# EAGLE board 605_motor (EAGLE 8.1.1)
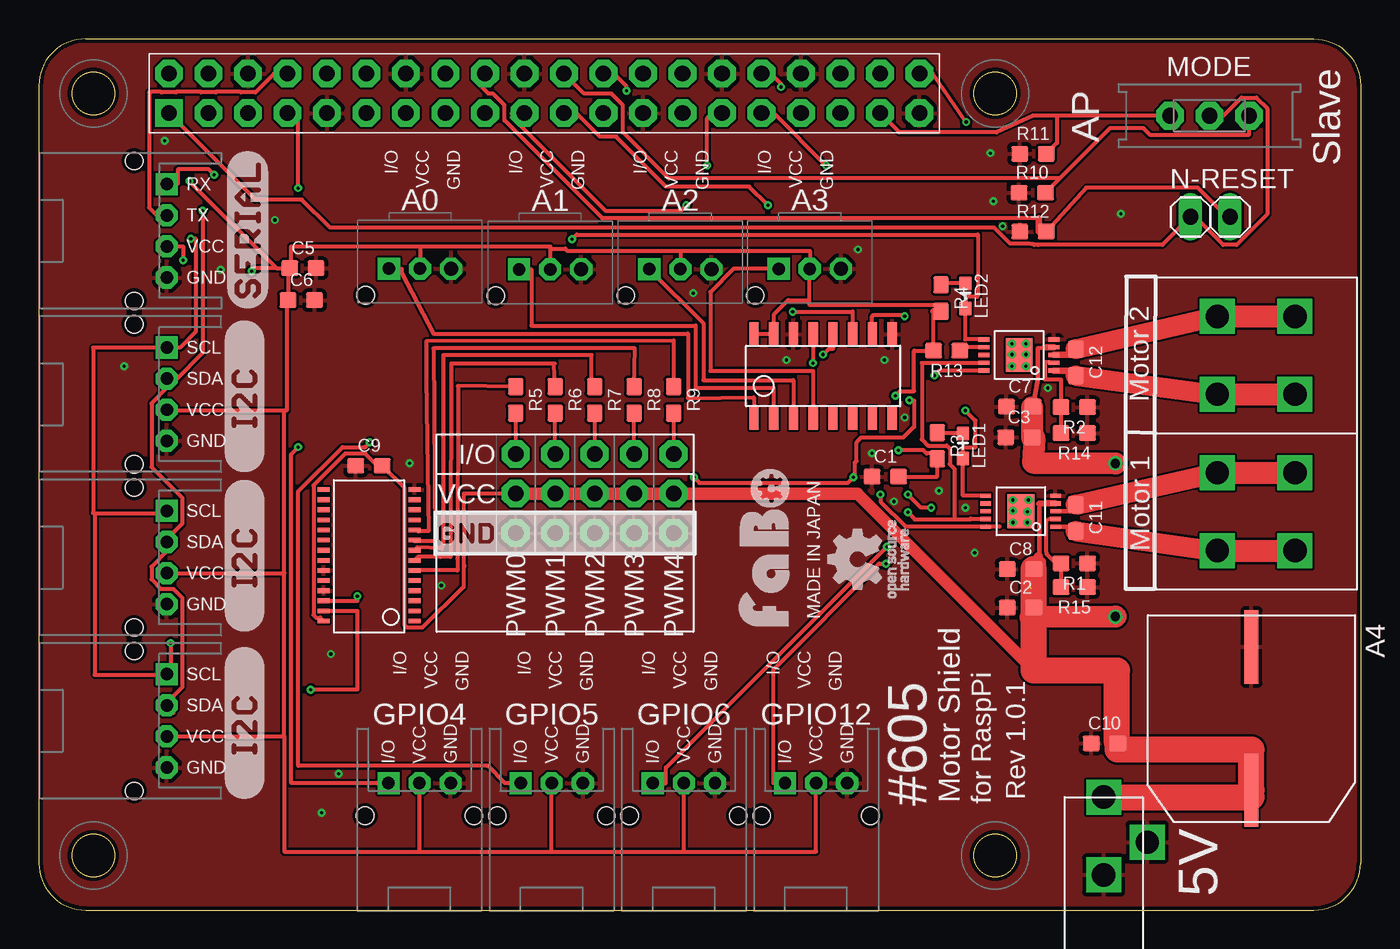
[diagram p0: board, top side]
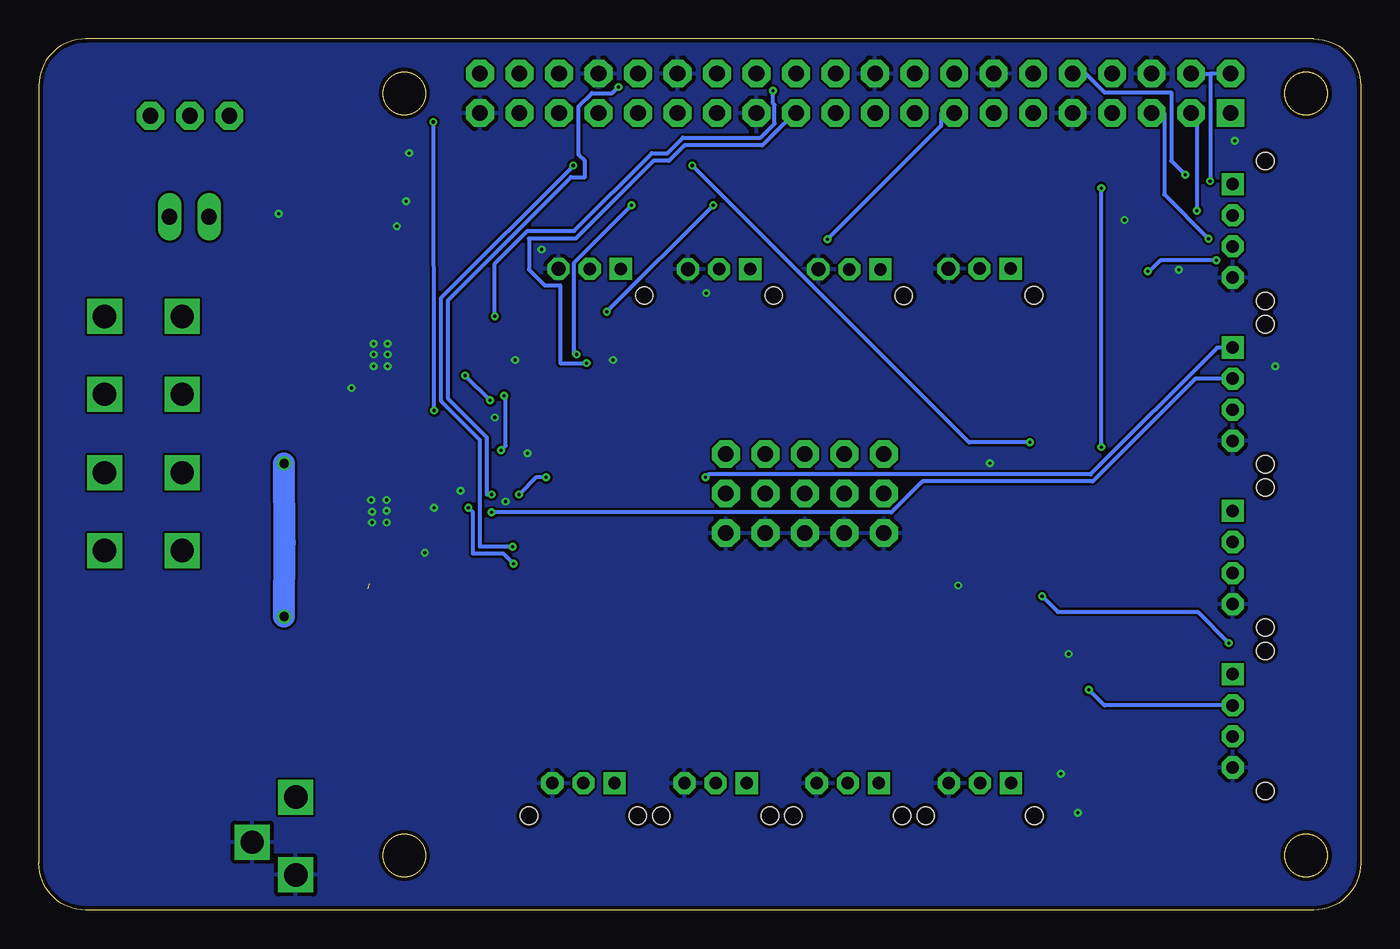
[diagram p1: board, bottom side, seen from below]

Size 85 x 56 mm. Coordinates in mm from the lower left corner, seen from the top.
Copper layers (1*16): Top 0.035mm / dielectric 1.5mm / Bottom 0.035mm
Design rules "Elecrow_2-layer_eagle_rule": minimum track width 6mil, minimum drill 12mil, track to track 6mil, track to pad 6mil, pad to pad 6mil, via to via 6mil, smd to smd 0mil, copper to edge 10mil, drill to drill 10mil, minimum pad ring 10mil, minimum via ring 6mil, stop-mask expansion 2mil, vias tented up to drill 100mil, thermal gap 10mil

## Footprints (pad centres in the part's own frame; a part is rotated, then mirrored left to right if it is on the bottom)
FABO_BRICK_3PIN_B03B-PASK-1 = drill 0.9 pad 1.422 octagon: GND -2,0 | drill 0.8 pad 1.422 square: I/O 2,0 | drill 0.8 pad 1.422 octagon: VCC 0,0 | hole 1.1: 3.5,1.7
H13 = smd 4.7 x 0.9: MINUS -4.6,0; PLUS 4.6,0
0603 = smd 1.1 x 1: 1 -0.85,0; 2 0.85,0
FABO_BRICK_3PIN_S03B-PASK-2 = drill 0.8 pad 1.422 octagon: GND -2,0; VCC 0,0 | drill 0.8 pad 1.422 square: I/O 2,0 | hole 1.1: 3.5,2.1; -3.5,2.1
FABO_BRICK_3PIN_HEADER = drill 1 pad 1.778 octagon: GND -2.54,0; I/O 2.54,0; VCC 0,0
FABO_BRICK_I2C_S04B-PASK-2 = drill 0.8 pad 1.422 octagon: GND -3,0; SDA 1,0; VCC -1,0 | drill 0.8 pad 1.422 square: SCL 3,0 | hole 1.1: 4.5,2.1; -4.5,2.1
MICROCHIP-MCP3008 = smd 0.6 x 1.5: 1 -4.445,-2.7; 2 -3.175,-2.7; 3 -1.905,-2.7; 4 -0.635,-2.7; 5 0.635,-2.7; 6 1.905,-2.7; 7 3.175,-2.7; 8 4.445,-2.7; 9 4.445,2.7; 10 3.175,2.7; 11 1.905,2.7; 12 0.635,2.7; 13 -0.635,2.7; 14 -1.905,2.7; 15 -3.175,2.7; 16 -4.445,2.7
0603' = smd 0.9 x 0.8: ANODE -0.8,0; CATHODE 0.8,0
EG1218 = drill 1 pad 1.778 octagon: 1 -2.54,0; 2 0,0; 3 2.54,0
1X02 = drill 1.016 long: 1 -1.27,0; 2 1.27,0
FABO_BRICK_SERIAL_S04B-PASK-2 = drill 0.8 pad 1.422 octagon: GND -3,0; TX 1,0; VCC -1,0 | drill 0.8 pad 1.422 square: RX 3,0 | hole 1.1: 4.5,2.1; -4.5,2.1
RASPBERRY_PI_B+ = drill 1 pad 1.778 square: 1 0,-2.54 | drill 1 pad 1.778 octagon: 2 0,0; 3 2.54,-2.54; 4 2.54,0; 5 5.08,-2.54; 6 5.08,0; 7 7.62,-2.54; 8 7.62,0; 9 10.16,-2.54; 10 10.16,0; 11 12.7,-2.54; 12 12.7,0; 13 15.24,-2.54; 14 15.24,0; 15 17.78,-2.54; 16 17.78,0; 17 20.32,-2.54; 18 20.32,0; 19 22.86,-2.54; 20 22.86,0; 21 25.4,-2.54; 22 25.4,0; 23 27.94,-2.54; 24 27.94,0; 25 30.48,-2.54; 26 30.48,0; 27 33.02,-2.54; 28 33.02,0; 29 35.56,-2.54; 30 35.56,0; 31 38.1,-2.54; 32 38.1,0; 33 40.64,-2.54; 34 40.64,0; 35 43.18,-2.54; 36 43.18,0; 37 45.72,-2.54; 38 45.72,0; 39 48.26,-2.54; 40 48.26,0
DRV8830 = smd 0.27 x 0.7: 1 -1,-2.24; 2 -0.5,-2.24; 3 0,-2.24; 4 0.5,-2.24; 5 1,-2.24; 6 1,2.26; 7 0.5,2.26; 8 0,2.26; 9 -0.5,2.26; 10 -1,2.26 | smd 2.18 x 1.72: P$1 0,0
PCA9685 = smd 0.3 x 0.75: 1 -4.15,-2.93; 2 -3.5,-2.93; 3 -2.85,-2.93; 4 -2.2,-2.93; 5 -1.55,-2.93; 6 -0.9,-2.93; 7 -0.25,-2.93; 8 0.4,-2.93; 9 1.05,-2.93; 10 1.7,-2.93; 11 2.35,-2.93; 12 3,-2.93; 13 3.65,-2.93; 14 4.3,-2.93; 15 4.3,2.92; 16 3.65,2.92; 17 3,2.92; 18 2.35,2.92; 19 1.7,2.92; 20 1.05,2.92; 21 0.4,2.92; 22 -0.25,2.92; 23 -0.9,2.92; 24 -1.55,2.92; 25 -2.2,2.92; 26 -2.85,2.92; 27 -3.5,2.92; 28 -4.15,2.92
ML-1400-S1 = drill 1.5 square: LEFT1 -2.5,2.5; LEFT2 -2.5,-2.5; RIGHT1 2.5,2.5; RIGHT2 2.5,-2.5
4UCON-DC = drill 1.5 square: GND1 0.5,0; GND2 2.6,-2.8; VCC 5.5,0

## Placement (x,y rotation side)
A0  [FABO_BRICK_3PIN_B03B-PASK-1]  24.51,41.23 180 top
A1  [FABO_BRICK_3PIN_B03B-PASK-1]  32.88,41.19 180 top
A2  [FABO_BRICK_3PIN_B03B-PASK-1]  41.25,41.2 180 top
A3  [FABO_BRICK_3PIN_B03B-PASK-1]  49.57,41.21 180 top
A4  [H13]  77.98,12.31 270 top
C1  0.1uf  [0603]  54.43,27.86 0 top
C2  10uF  [0603]  63.13,19.44 0 top
C3  10uF  [0603]  63.03,30.39 0 top
C5  0.1uf  [0603]  16.98,41.26 0 top
C6  22uf  [0603]  16.88,39.21 0 top
C7  0.1uF  [0603]  63.08,32.36 0 top
C8  0.1uF  [0603]  63.13,21.91 0 top
C9  0.1uF  [0603]  21.23,28.56 0 top
C10  0.1uF  [0603]  68.53,10.71 0 top
C11  1000pF  [0603]  66.68,25.21 270 top
C12  1000pF  [0603]  66.68,35.21 270 top
GPIO4  [FABO_BRICK_3PIN_S03B-PASK-2]  24.48,8.16 180 top
GPIO5  [FABO_BRICK_3PIN_S03B-PASK-2]  32.98,8.16 180 top
GPIO6  [FABO_BRICK_3PIN_S03B-PASK-2]  41.48,8.16 180 top
GPIO12  [FABO_BRICK_3PIN_S03B-PASK-2]  49.98,8.16 180 top
GPIO23S  [FABO_BRICK_3PIN_HEADER]  30.66,26.77 90 top
GPIO24S  [FABO_BRICK_3PIN_HEADER]  33.2,26.77 90 top
GPIO25S  [FABO_BRICK_3PIN_HEADER]  35.74,26.77 90 top
GPIO26S  [FABO_BRICK_3PIN_HEADER]  38.28,26.77 90 top
GPIO27S  [FABO_BRICK_3PIN_HEADER]  40.82,26.77 90 top
I2C1  [FABO_BRICK_I2C_S04B-PASK-2]  8.23,33.16 90 top
I2C2  [FABO_BRICK_I2C_S04B-PASK-2]  8.23,22.66 90 top
I2C3  [FABO_BRICK_I2C_S04B-PASK-2]  8.23,12.16 90 top
IC1  [MICROCHIP-MCP3008]  50.43,34.33 0 top
LED1  [0603']  59.42,29.84 270 top
LED2  [0603']  59.57,39.48 270 top
MODE  [EG1218]  75.28,51.06 0 top
N-RESET  [1X02]  75.33,44.56 0 top
R1  0.4  [0603]  66.58,22.28 180 top
R2  0.4  [0603]  66.58,32.33 180 top
R3  1K  [0603]  57.77,29.85 270 top
R4  1K  [0603]  58.02,39.34 270 top
R5  220  [0603]  30.66,32.8 270 top
R6  220  [0603]  33.2,32.8 270 top
R7  220  [0603]  35.74,32.8 270 top
R8  220  [0603]  38.28,32.8 270 top
R9  220  [0603]  40.82,32.8 270 top
R10  1K  [0603]  63.88,46.11 0 top
R11  1K  [0603]  63.93,48.61 0 top
R12  1K  [0603]  63.93,43.61 0 top
R13  1K  [0603]  58.38,35.96 180 top
R14  0.4  [0603]  66.58,30.66 180 top
R15  0.4  [0603]  66.58,20.76 180 top
SERIAL  [FABO_BRICK_SERIAL_S04B-PASK-2]  8.23,43.66 90 top
U1  [RASPBERRY_PI_B+]  8.37,53.77 0 top
U$2  [LOGO_SILK_I2C]  14.48,17.91 90 top
U$3  [LOGO_SILK_SERIAL2]  14.73,38.66 90 top
U$4  [LOGO_OSHW_T_MS]  52.68,22.56 90 top
U$5  [LOGO_SILK_I2C]  14.48,7.16 90 top
U$6  [LOGO_SILK_I2C]  14.48,28.16 90 top
U$7  [LOGO_SILK_GND]  25.58,22.96 0 top
U$8  DRV8830  [DRV8830]  63.14,25.64 90 top
U$9  PCA9685  [PCA9685]  21.23,22.73 90 top
U$10  DRV8830  [DRV8830]  63.04,35.68 90 top
U$12  ML-1400-S1  [ML-1400-S1]  78.28,25.61 90 top
U$13  ML-1400-S1  [ML-1400-S1]  78.28,35.66 90 top
U$14  [LOGO_FABO_MS]  48.63,23.3 90 top
U$15  4UCON-DC  [4UCON-DC]  68.48,1.76 90 top

## Library data of the parts
A0 A1-A3 GPIO4-GPIO6 GPIO12 GPIO23S GPIO24S GPIO25S GPIO26S GPIO27S I2C1-I2C3 SERIAL = FaBo-Template
A4 C1-C3 C5-C12 = FaBo-Capacitor
IC1 = FaBo-ADC
LED1 LED2 = FaBo-LED
MODE = FaBo-Switch
N-RESET = pinhead
R1-R15 = FaBo-Resistors
U1 = FaBo-Boards
U$2 U$3 U$5-U$7 U$14 = FaBo-etc
U$4 = FaBo-Logo
U$8-U$10 = FaBo-Motor
U$12 U$13 = FaBo-Terminal
U$15 = FaBo-Supply

## Nets
3V3: MODE.2 N-RESET.1 U1.1
5V: A0.VCC A1.VCC A2.VCC A3.VCC C1.2 C5.1 C6.1 GPIO4.VCC GPIO5.VCC GPIO6.VCC GPIO12.VCC I2C1.VCC I2C2.VCC I2C3.VCC IC1.15 IC1.16 R3.2 R4.2 R13.2 SERIAL.VCC U1.2 U1.4
CE0: IC1.10 U1.24
CH0: A0.I/O IC1.1
CH1: A1.I/O IC1.2
CH2: A2.I/O IC1.3
CH3: A3.I/O IC1.4
CH4: IC1.5
CH5: IC1.6
CH6: IC1.7
CH7: IC1.8
GND: A0.GND A1.GND A2.GND A3.GND A4.MINUS C1.1 C2.1 C3.1 C5.2 C6.2 C7.1 C8.1 C9.1 C10.1 GPIO4.GND GPIO5.GND GPIO6.GND GPIO12.GND GPIO23S.GND GPIO24S.GND GPIO25S.GND GPIO26S.GND GPIO27S.GND I2C1.GND I2C2.GND I2C3.GND IC1.9 IC1.14 R1.1 R2.1 R10.1 R11.1 R12.1 R14.1 R15.1 SERIAL.GND U1.6 U1.9 U1.14 U1.20 U1.25 U1.30 U1.34 U1.39 U$8.5 U$9.14 U$9.23 U$9.25 U$10.5 U$15.GND1 U$15.GND2
GPIO4: GPIO4.I/O U1.7
GPIO5: GPIO5.I/O U1.29
GPIO6: GPIO6.I/O U1.31
GPIO12: GPIO12.I/O U1.32
GPIO13: U1.33
GPIO16: U1.36
GPIO17: U1.11
GPIO18: U1.12
GPIO19: U1.35
GPIO20: U1.38
GPIO21: LED1.CATHODE U1.40 U$8.6
GPIO22: LED2.CATHODE U1.15 U$10.6
GPIO23: U1.16
GPIO24: N-RESET.2 R12.2 U1.18
GPIO25: MODE.3 R10.2 U1.22
GPIO26: MODE.1 R11.2 U1.37
GPIO27: U1.13
LED0: R5.1 U$9.6
LED1: R6.1 U$9.7
LED2: R7.1 U$9.8
LED3: R8.1 U$9.9
LED4: R9.1 U$9.10
M1_1: C11.2 U$8.1 U$12.LEFT1 U$12.LEFT2
M1_2: C11.1 U$8.3 U$12.RIGHT1 U$12.RIGHT2
M2_1: C12.2 U$10.1 U$13.LEFT1 U$13.LEFT2
M2_2: C12.1 U$10.3 U$13.RIGHT1 U$13.RIGHT2
MISO: IC1.12 U1.21
MOSI: IC1.11 U1.19
N$2: R1.2 R15.2 U$8.2
N$3: R2.2 R14.2 U$10.2
N$4: LED1.ANODE R3.1
N$5: R13.1 U$10.7
N$6: LED2.ANODE R4.1
PWM0: GPIO23S.I/O R5.2
PWM1: GPIO24S.I/O R6.2
PWM2: GPIO25S.I/O R7.2
PWM3: GPIO26S.I/O R8.2
PWM4: GPIO27S.I/O R9.2
RX: SERIAL.RX U1.10
SCL: I2C1.SCL I2C2.SCL I2C3.SCL U1.5 U$8.10 U$9.26 U$10.10
SCLK: IC1.13 U1.23
SDA: I2C1.SDA I2C2.SDA I2C3.SDA U1.3 U$8.9 U$9.27 U$10.9
TX: SERIAL.TX U1.8
VCC: A4.PLUS C2.2 C3.2 C7.2 C8.2 C9.2 C10.2 GPIO23S.VCC GPIO24S.VCC GPIO25S.VCC GPIO26S.VCC GPIO27S.VCC U$8.4 U$9.28 U$10.4 U$15.VCC

## Tracks (layer width: path | path; a pad name or v marks a point on that pad's centre or on a via)
3V3
  Top 0.254: MODE.2 76.17,51.06 77.34,52.23 78.3,52.23 78.99,51.54 78.99,44.71 77.03,42.76 76.17,42.76 74.37,44.56 N-RESET.1 72.26,42.76 64.25,42.76 64,42.75 63.83,42.82 63.96,42.8 63.69,42.83 62.47,42.83 61.44,43.86 18.72,43.86 16.91,45.67 13.93,45.67 U1.1
5V  (via drill 0.2)
  Top 0.254: 15.28,41.26 C5.1 | v9.68,46.86 15.28,41.26 | C5.1 16.03,41.26 C6.1 15.93,39.21 15.93,32.11 15.78,32.11 | C5.1 16.23,41.26 16.23,42.66 24.51,42.66 | 24.51,42.66 A0.VCC | 24.51,42.66 32.88,42.66 32.88,42.51 | 32.88,42.51 A1.VCC | 32.88,42.51 33.84,42.51 33.98,42.38 41.16,42.38 | 41.16,42.38 41.18,42.36 41.25,42.36 A2.VCC | 41.16,42.38 49.57,42.38 A3.VCC 49.53,41.21 49.53,39.21 | 49.53,39.21 49.53,38.91 58.02,38.91 R4.2 58.08,38.49 | C1.2 57.77,27.86 R3.2 57.78,29.06 57.78,29.36 57.08,29.36 56.88,29.56 v55.28,29.56 | 15.78,32.11 8.23,32.11 I2C1.VCC | 15.78,21.66 15.78,32.11 | I2C2.VCC 15.78,21.66 | 15.78,11.16 15.78,21.66 | I2C3.VCC 15.78,11.16 | 24.48,3.76 15.78,3.76 15.78,11.16 | 24.48,3.76 GPIO4.VCC | 24.48,3.76 32.98,3.76 | 32.98,3.76 GPIO5.VCC | 32.98,3.76 41.48,3.76 | 41.48,3.76 GPIO6.VCC | 41.48,3.76 49.98,3.76 GPIO12.VCC | IC1.16 46.03,37.06 47.23,37.06 IC1.15 47.28,37.16 47.28,38.31 48.18,39.21 49.53,39.21 | v9.28,41.76 9.28,42.66 SERIAL.VCC | v13.68,41.06 13.88,41.26 15.28,41.26 | v55.08,33.06 55.38,33.36 56.28,33.36 56.28,35.96 R13.2 57.53,38.49
  Top 0.406: 57.53,38.49 R4.2
  Bottom 0.254: 9.68,53.76 v9.68,46.86 | 9.68,53.76 U1.2 | v9.28,41.76 12.88,41.76 13.58,41.06 v13.68,41.06 | v55.08,33.06 54.98,32.96 54.98,29.86 v55.28,29.56 | U1.4 9.68,53.77 9.68,53.76
CE0  (via drill 0.2)
  Top 0.254: v37.78,52.66 37.78,52.96 36.98,53.76 36.38,53.76 U1.24 | v55.68,38.16 55.58,38.26 53.68,38.26 53.58,38.16 53.58,37.06 IC1.10
  Bottom 0.254: v37.78,52.66 37.78,51.86 37.68,51.76 37.68,50.56 38.58,49.66 43.58,49.66 44.58,48.66 45.58,48.66 50.58,43.66 53.58,43.66 55.68,41.56 v55.68,38.16
CH0
  Top 0.254: IC1.1 45.98,31.66 45.98,32.96 41.73,32.91 41.73,37.06 25.38,37.06 23.33,40.96 23.33,41.21 22.53,41.21 A0.I/O
CH1
  Top 0.254: A1.I/O 31.68,41.19 31.68,37.56 42.23,37.56 42.23,33.56 47.25,33.56 IC1.2
CH2
  Top 0.254: A2.I/O 42.73,37.72 42.73,34.06 48.52,34.06 IC1.3
CH3
  Top 0.254: A3.I/O 44.67,41.21 43.18,39.73 43.18,34.66 49.79,34.66 IC1.4
GND  (via drill 0.2)
  other vias: 15.18,44.36 11.68,41.16 5.48,34.96 8.08,49.46 18.78,16.46 18.18,6.26 69.58,44.76 19.28,8.76 61.18,48.66 61.98,43.96 48.08,35.36 25.88,20.86 23.83,28.71 61.38,45.56 52.68,42.46 54.38,35.36 53.58,29.36 57.88,26.96 54.98,26.26 59.58,25.86 60.18,22.96 42.08,39.66 55.68,31.66 64.88,33.56 62.58,36.41 63.48,36.41 63.48,35.71 62.58,35.71 62.58,34.96 63.48,34.96 62.63,26.36 63.63,26.36 62.63,25.66 63.58,25.61 62.63,24.91 63.58,24.91
  pour Bottom: -0.52,-0.84 85.48,-0.84 85.48,57.16 -0.52,57.16
  pour Top: -0.52,-0.84 85.48,-0.84 85.48,57.16 -0.52,57.16
GPIO4  (via drill 0.2)
  Top 0.254: v16.68,46.41 16.68,51.16 16.63,51.21 16.03,51.21 U1.7 | v16.68,29.76 16.23,29.31 16.23,8.16 GPIO4.I/O
  Bottom 0.254: v16.68,29.76 v16.68,46.41
GPIO5  (via drill 0.2)
  Top 0.254: v42.98,47.86 42.98,50.91 43.28,51.21 43.93,51.21 U1.29 | v21.28,30.06 20.98,29.76 19.53,29.76 16.68,26.91 16.68,9.26 28.88,9.26 29.98,8.16 GPIO5.I/O
  Bottom 0.254: v42.98,47.86 25.18,30.06 v21.28,30.06
GPIO6  (via drill 0.2)
  Top 0.254: v50.63,47.86 47.28,51.21 46.48,51.21 U1.31 | v54.53,23.36 40.33,9.16 40.33,8.16 GPIO6.I/O
  Bottom 0.254: v50.63,47.86 59.13,39.36 59.13,32.71 56.63,30.21 56.63,23.36 v54.53,23.36
GPIO12  (via drill 0.2)
  Top 0.254: v47.73,52.91 47.73,53.11 47.08,53.76 U1.32 | v55.88,26.71 56.73,25.86 v57.38,25.86 | v54.48,22.26 54.03,22.26 47.23,15.46 47.23,8.16 GPIO12.I/O
  Bottom 0.254: v47.73,52.91 48.13,52.51 49.43,52.51 50.28,51.66 50.28,48.56 49.88,48.16 49.88,47.11 50.78,47.11 58.68,39.21 58.68,32.86 56.18,30.36 56.18,26.71 v55.88,26.71 | v57.38,25.86 57.08,25.56 57.08,22.91 55.13,22.91 v54.48,22.26
GPIO21  (via drill 0.2)
  Top 0.254: U$8.6 59.42,26.64 LED1.CATHODE 59.43,29.16 59.43,29.71 59.48,29.76 60.23,29.76 60.23,31.46 v59.58,32.11 | v59.63,50.66 57.48,53.76 U1.40
  Bottom 0.254: v59.58,32.11 v59.63,50.66
GPIO22  (via drill 0.2)
  Top 0.254: U$10.6 59.57,36.68 LED2.CATHODE 59.58,38.76 59.58,39.41 60.33,39.41 60.38,39.46 60.38,43.41 34.58,43.41 v34.28,43.11
  Bottom 0.254: v34.28,43.11 26.98,50.41 26.98,51.21 26.18,51.21 U1.15
GPIO24
  Top 0.254: 76.4,44.56 74.52,46.44 67.36,46.44 R12.2 | 64.32,44.47 36.23,44.47 29.93,50.77 29.93,51.75 29.21,52.48 28.91,52.48 28.53,52.86 28.53,53.61 U1.18
  Top 0.406: N-RESET.2 76.4,44.56 | R12.2 64.32,43.61 64.32,44.47
GPIO25
  Top 0.254: MODE.3 77.82,49.85 77.78,49.81 71.48,49.81 71.03,50.26 68.88,50.26 65.66,47.04 | 65.66,47.04 R10.2 | 65.66,47.04 40.5,47.04 37.55,49.99 37.55,51.75 36.83,52.48 35.06,52.48 U1.22
GPIO26
  Top 0.254: MODE.1 65.48,51.06 | 65.48,51.06 63.91,51.06 61.58,49.99 55.33,49.99 U1.37 | 65.48,51.06 65.48,49.31 R11.2
LED0
  Top 0.254: R5.1 26.95,33.7 26.93,22.61 26.91,22.61 26.91,21.83 U$9.6
LED1
  Top 0.254: R6.1 33.14,35.1 33.16,35.12 26.52,35.12 26.47,22.7 25.82,22.7 24.38,22.7 U$9.7
LED2
  Top 0.254: R7.1 35.53,33.65 35.55,35.68 26,35.68 25.99,30.46 25.99,23.49 25.9,23.25 24.34,23.3 U$9.8
LED3
  Top 0.254: R8.1 38.33,36.11 25.38,36.11 25.48,23.71 24.16,23.71 U$9.9
LED4
  Top 0.254: R9.1 40.83,36.61 24.91,36.56 24.91,34.21 25.06,24.36 24.42,24.35 23.94,24.4 U$9.10
M1_1
  Top 0.305: U$8.1 66.68,24.64 C11.2
  Top 1.27: C11.2 75.78,23.06 U$12.LEFT1
  Top 1.422: U$12.LEFT1 U$12.LEFT2
M1_2
  Top 0.305: U$8.3 66.68,25.64 C11.1
  Top 1.27: C11.1 75.73,28.11 U$12.RIGHT1
  Top 1.422: U$12.RIGHT1 U$12.RIGHT2
M2_1
  Top 0.406: U$10.1 66.68,34.68 C12.2
  Top 1.27: C12.2 75.78,33.11
  Top 1.422: 75.78,33.11 U$13.LEFT1 U$13.LEFT2
M2_2
  Top 0.406: U$10.3 66.68,35.68 C12.1
  Top 1.27: C12.1 75.83,38.16
  Top 1.422: 75.83,38.21 U$13.RIGHT1 75.83,38.16 U$13.RIGHT2
MISO  (via drill 0.2)
  Top 0.254: v46.88,45.31 45.68,46.51 40.33,46.51 37.13,49.71 36.08,49.71 34.58,51.21 33.78,51.21 U1.21 | v50.43,35.71 50.78,36.06 51.03,36.06 51.08,36.11 51.08,37.01 IC1.12
  Bottom 0.254: v46.88,45.31 50.58,41.61 50.58,35.71 v50.43,35.71
MOSI  (via drill 0.2)
  Top 0.254: v48.48,38.46 52.33,38.46 52.33,37.06 IC1.11 | v41.63,45.31 41.28,44.96 36.43,44.96 30.43,50.96 30.43,51.21 31.23,51.21 U1.19
  Bottom 0.254: v41.63,45.31 v48.48,38.46
N$2
  Top 0.254: R1.2 65.4,22.28 64.89,22.79 64.86,22.82 64.79,23.02 64.79,25.02 65.01,25.14 U$8.2 | R1.2 R15.2
  Top 0.406: R1.2
N$3
  Top 0.254: U$10.2 65.03,35.18 65.03,35.21 64.69,35.21 64.68,34.11 65.73,34.11 R2.2 | R2.2 R14.2
  Top 0.406: R2.2
N$4
  Top 0.254: LED1.ANODE 57.77,30.64 R3.1
N$5
  Top 0.254: U$10.7 59.23,36.18
  Top 0.406: 59.23,36.18 R13.1
N$6
  Top 0.254: LED2.ANODE 58.02,40.28 R4.1
PWM0
  Top 0.254: R5.2 GPIO23S.I/O
PWM1
  Top 0.254: GPIO24S.I/O R6.2
PWM2
  Top 0.254: R7.2 GPIO25S.I/O
PWM3
  Top 0.254: GPIO26S.I/O R8.2
PWM4
  Top 0.254: R9.2 GPIO27S.I/O
RX  (via drill 0.2)
  Top 0.254: SERIAL.RX 8.88,46.66 8.93,46.71 8.93,47.61 10.93,47.61 v11.28,47.26
  Bottom 0.254: v11.28,47.26 12.18,48.16 12.18,52.56 16.48,52.56 17.68,53.76 U1.10
SCL  (via drill 0.2)
  Top 0.254: v9.78,43.16 10.08,43.16 10.08,37.16 9.08,36.16 I2C1.SCL 3.48,36.16 3.48,25.51 3.58,25.51 | v54.13,26.71 54.13,26.26 55.73,24.66 60.88,24.66 U$8.10 60.98,24.66 61.78,24.66 | v42.13,27.81 42.48,27.46 52.03,27.46 v52.38,27.81 52.48,27.86 52.48,28.76 52.58,28.86 52.58,30.06 52.88,30.36 55.58,30.36 56.28,31.06 56.28,32.76 v55.98,32.76 | 3.58,25.51 8.23,25.51 I2C2.SCL | 3.58,25.51 3.58,15.11 8.23,15.11 I2C3.SCL 8.48,15.16 v8.48,17.16 | U$9.26 20.48,19.88 v20.48,20.16 | 60.98,34.66 60.88,34.66 U$10.10 60.68,34.66 57.88,34.66 v57.58,34.36
  Bottom 0.254: v9.78,43.16 12.63,46.01 12.63,51.21 13.43,51.21 U1.5 | v54.13,26.71 53.03,27.81 v52.38,27.81 | v42.13,27.81 41.93,28.01 17.38,28.01 9.23,36.16 I2C1.SCL | v8.48,17.16 10.48,19.16 19.48,19.16 v20.48,20.16 | v57.58,34.36 v55.98,32.76
SCLK  (via drill 0.2)
  Top 0.254: 49.78,36.93 v49.78,35.16 | IC1.13 49.78,36.93 | 49.78,36.93 49.78,37.16
  Bottom 0.254: v49.78,35.16 51.48,35.16 51.48,40.16 52.48,40.16 53.48,41.16 53.48,43.16 50.48,43.16 45.48,48.16 44.48,48.16 43.48,49.16 38.48,49.16 36.48,51.16 U1.23
SDA  (via drill 0.2)
  Top 0.254: v10.53,44.96 10.53,35.81 8.88,34.16 I2C1.SDA 8.23,33.56 7.24,32.57 7.24,28.47 9.22,26.49 9.22,24.83 8.23,23.84 I2C2.SDA 8.23,23.06 7.24,22.07 7.24,21.25 7.84,20.65 8.64,20.65 9.22,20.07 9.22,14.33 8.63,13.74 8.63,12.66 8.23,12.66 I2C3.SDA | 58.88,25.11 56.33,25.11 v55.88,25.56 | 58.88,25.11 59.88,25.11 59.93,25.16 60.88,25.16 U$8.9 | v17.48,14.16 20.48,14.16 20.48,19.23 U$9.27 | 58.88,25.11 58.88,28.36 58.58,28.66 58.58,29.66 58.38,29.86 57.18,29.86 56.78,30.26 56.78,35.16 60.78,35.16 U$10.9
  Bottom 0.254: v10.53,44.96 10.53,51.21 10.88,51.21 U1.3 | v55.88,25.56 30.18,25.56 28.18,27.56 17.23,27.56 10.63,34.16 I2C1.SDA | v17.48,14.16 16.48,13.16 I2C3.SDA
TX
  Top 0.254: SERIAL.TX 7.58,44.66 7.08,45.16 7.08,52.56 7.18,52.56 7.23,52.61 7.83,52.61 7.88,52.56 8.83,52.56 8.88,52.61 10.38,52.61 10.43,52.56 11.38,52.56 11.43,52.61 12.93,52.61 12.98,52.56 13.93,52.56 15.13,53.76 U1.8
VCC  (via drill 0.6)  (1 unrouted)
  Top 0.254: U$9.28 18.09,18.8 17.82,18.8 17.66,18.96 17.66,27.29 19.7,29.34 20.99,29.34 21.77,28.56 C9.2 23.51,27.13 23.51,18.31 23.67,18.15 24.65,18.15 27.32,20.77 27.32,22.24 27.33,22.4 27.33,22.43 | 27.33,22.43 27.34,22.04 | GPIO23S.VCC 27.33,26.77 27.35,22.97 27.34,22.76 27.33,22.76 27.33,22.43
  Top 0.305: 64.33,22.81 64.33,26.12 | 64.79,36.17 64.23,36.11 64.23,34.66 64.23,34.11 C7.2
  Top 0.406: C2.2 63.98,21.51 63.83,20.66 | 64.83,26.16 64.88,26.16 64.89,26.15 U$8.4 | 63.78,18.81 63.73,20.96 | 64.33,22.81 64.08,22.41 64.28,22.71 | 64.33,22.81 64.18,22.61 | 64.33,22.81 64.28,22.11 | 64.28,22.11 64.28,22.36 64.13,22.21 63.88,21.96 | C8.2 64.13,21.91 64.28,22.11 | 64.33,26.12 64.91,26.15 U$8.4 | U$8.4 | 64.01,30.36 C3.2 | 63.88,32.31 C7.2 | 65,36.19 64.98,36.17 64.79,36.17 64.8,36.18 U$10.4
  Top 0.61: 64.41,21.61 64.46,22.39 C8.2 64.13,22.21 64.28,22.71
  Top 0.813: GPIO23S.VCC GPIO24S.VCC GPIO25S.VCC GPIO26S.VCC GPIO27S.VCC 52.62,26.77 63.98,15.41
  Top 1.016: A4.PLUS 77.93,7.71
  Top 1.422: v69.23,28.71 63.93,28.76 64.01,30.36 | v69.23,18.86 63.78,18.81 | C3.2 63.88,32.31
  Top 1.676: U$15.VCC 77.98,7.26 A4.PLUS 77.98,10.31 69.38,10.31 C10.2 69.33,10.71 69.33,15.41 63.98,15.41 63.98,21.51 C8.2
  Bottom 1.422: v69.23,28.71 69.18,23.61 v69.23,18.86

## Text on the board
tPlace: I/O | VCC | GND | I/O | VCC | GND | I/O | VCC | GND | I/O | VCC | GND | AP | Slave | RX | TX | VCC | GND | SCL | SDA | Motor 2 | VCC | GND | I/O | VCC | SCL | SDA | PWM0 | PWM1 | PWM2 | PWM3 | PWM4 | MADE IN JAPAN | Motor 1 | VCC | GND | I/O | VCC | GND | I/O | VCC | GND | I/O | VCC | GND | I/O | VCC | GND | SCL | SDA | VCC | GND | I/O | VCC | GND | I/O | VCC | GND | I/O | VCC | GND | I/O | VCC | GND | #605 | Motor Shield | for RaspPi | Rev 1.0.1 | 5V